# EAGLE board StarvingStudent (EAGLE 7.5.0)
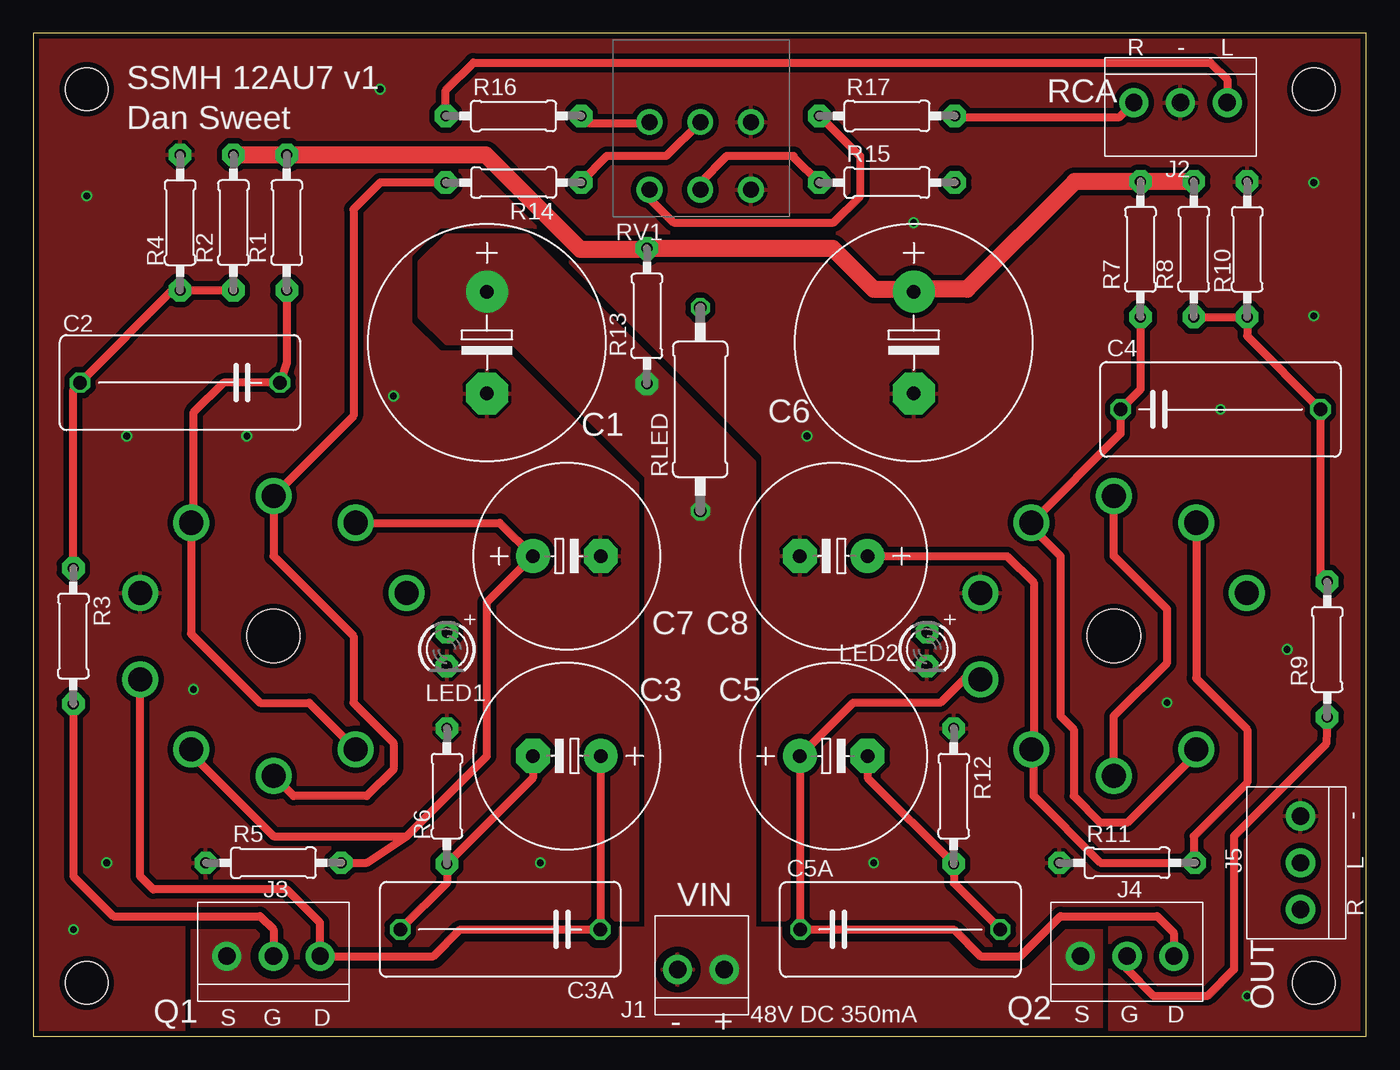
[diagram p0: board, top side]
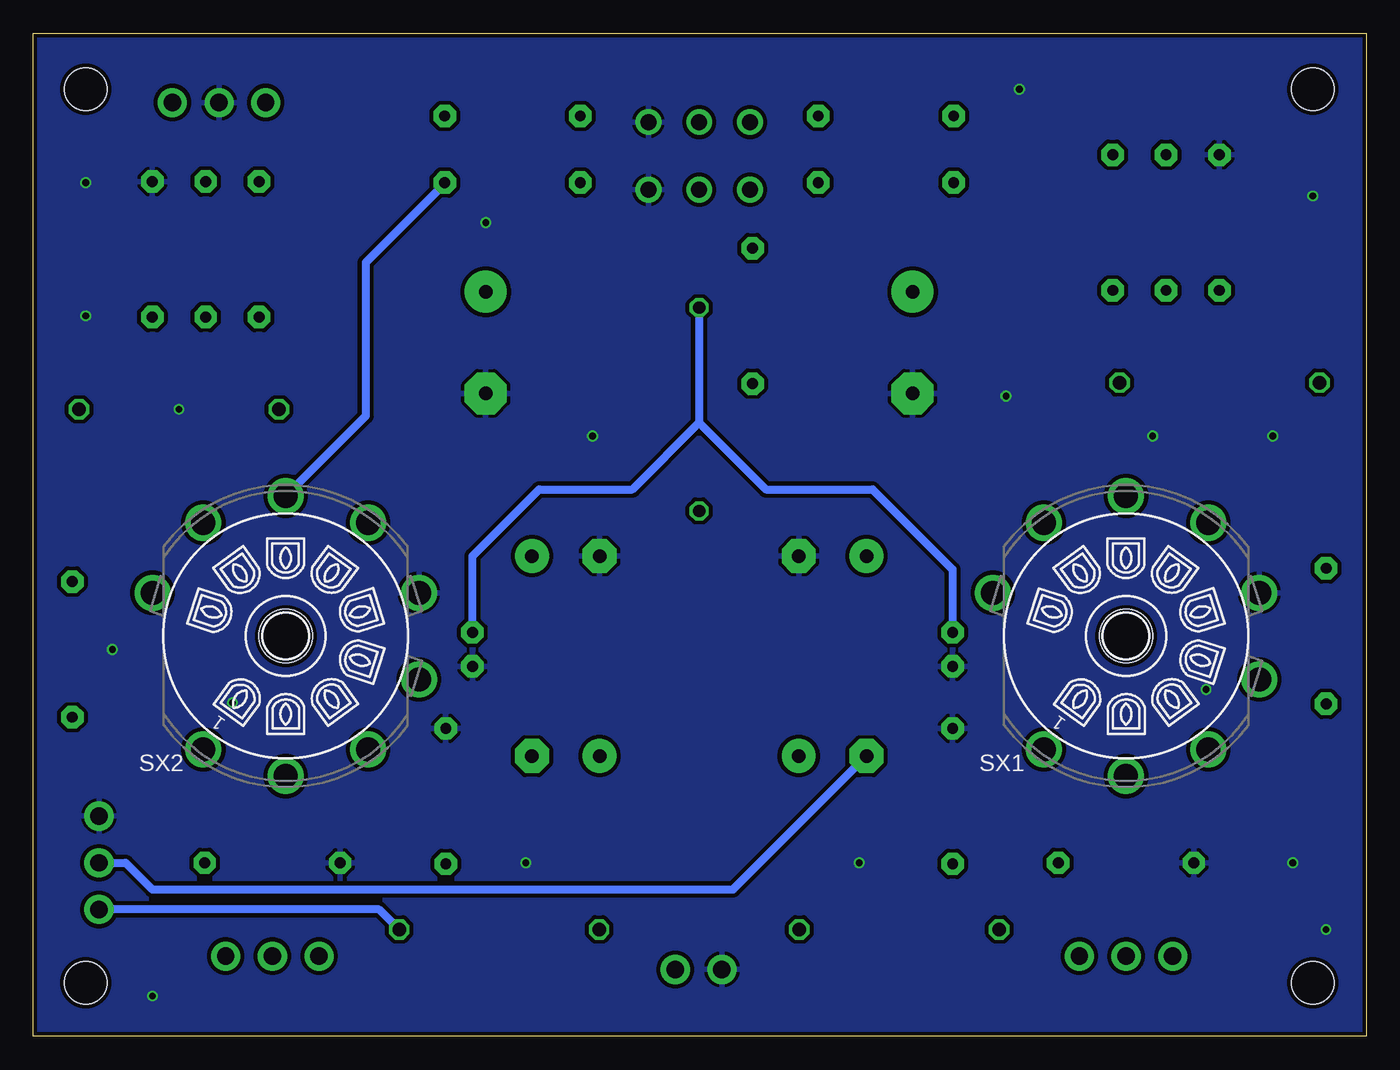
[diagram p1: board, bottom side, seen from below]

Size 99.92 x 75.19 mm. Coordinates in mm from the lower left corner, seen from the top.
Outline: 0,0 99.92,0 99.92,75.19 0,75.19 0,0
Copper layers (1*16): Top 0.035mm / dielectric 1.5mm / Bottom 0.035mm
Design rules "SeeedStudio_2layer_DRU_no_angle_20140221": minimum track width 6mil, minimum drill 12mil, track to track 6mil, track to pad 6mil, pad to pad 6mil, via to via 6mil, smd to smd 0mil, copper to edge 10mil, drill to drill 10mil, minimum pad ring 10mil, minimum via ring 6mil, stop-mask expansion 2mil, vias tented up to drill 100mil, thermal gap 10mil
Holes 4 mm at 18,30 81,30
Holes 3.2 mm at 4,4 4,71 96,71 96,4

## Footprints (pad centres in the part's own frame; a part is rotated, then mirrored left to right if it is on the bottom)
E7,5-18 = drill 1.016 pad 3.15: + -3.81,0 | drill 1.016 pad 3.15 octagon: - 3.81,0
C150-072X183 = drill 1.016 octagon: 1 -7.493,0; 2 7.493,0
E5-13 = drill 1.016 pad 2.54: + -2.54,0 | drill 1.016 pad 2.54 octagon: - 2.54,0
1X2-3.5MM = drill 1.3 pad 2.184: 1 1.8,0; 2 -1.7,0
1X3-3.5MM = drill 1.3 pad 2.184: 1 3.5,0; 2 0.001,-0.001; 3 -3.499,-0.001
LED3MM = drill 0.813 pad 1.676 octagon: A -1.27,0; K 1.27,0
0207/10 = drill 0.813 pad 1.676 octagon: 1 -5.08,0; 2 5.08,0
0411/15 = drill 0.914 octagon: 1 -7.62,0; 2 7.62,0
RV122F = drill 1.2 pad 1.93: L1 -3.81,2.54; L2 0,2.54; L3 3.81,2.54; R1 -3.81,-2.54; R2 0,-2.54; R3 3.81,-2.54
VT9-PT = drill 1.8 pad 2.4: 1 6.172,8.495; 2 0,10.5; 3 -6.172,8.495; 4 -9.986,3.245; 5 -9.986,-3.245; 6 -6.172,-8.495; 7 0,-10.5; 8 6.172,-8.495; 9 9.986,-3.244

## Placement (x,y rotation side)
C1  680uF  [E7,5-18]  34,52 270 top
C2  0.22uF  [C150-072X183]  11,49 180 top
C3  470uF  [E5-13]  40,21 180 top
C3A  0.22uF  [C150-072X183]  35,8 180 top
C4  0.22uF  [C150-072X183]  89,47 0 top
C5  470uF  [E5-13]  60,21 0 top
C5A  0.22uF  [C150-072X183]  65,8 0 top
C6  680uF  [E7,5-18]  66,52 270 top
C7  220uF  [E5-13]  40,36 0 top
C8  220uF  [E5-13]  60,36 180 top
DRILEGEND  [DRILEGEND]  -1.2,-5.01 0 top  (outside the outline)
J1  1X2-3.5MM  [1X2-3.5MM]  50,5 0 top
J2  1X3-3.5MM  [1X3-3.5MM]  86,70 180 top
J3  1X3-3.5MM  [1X3-3.5MM]  18,6 0 top
J4  1X3-3.5MM  [1X3-3.5MM]  82,6 0 top
J5  1X3-3.5MM  [1X3-3.5MM]  95,13 90 top
LED1  [LED3MM]  31,29 270 top
LED2  [LED3MM]  67,29 270 top
R1  33k  [0207/10]  19,61 90 top
R2  390k  [0207/10]  15,61 90 top
R3  2k  [0207/10]  3,30 270 top
R4  220k  [0207/10]  11,61 270 top
R5  2k  [0207/10]  18,13 0 top
R6  2k  [0207/10]  31,18 270 top
R7  33k  [0207/10]  83,59 90 top
R8  390k  [0207/10]  87,59 90 top
R9  2k  [0207/10]  97,29 270 top
R10  220k  [0207/10]  91,59 270 top
R11  2k  [0207/10]  82,13 0 top
R12  2k  [0207/10]  69,18 270 top
R13  2k  [0207/10]  46,54 90 top
R14  1k  [0207/10]  36,64 180 top
R15  1k  [0207/10]  64,64 0 top
R16  50k  [0207/10]  36,69 0 top
R17  50k  [0207/10]  64,69 0 top
RLED  2.4k  [0411/15]  50,47 90 top
RV1  RV122F  [RV122F]  50,66 0 top
SX1  VT9-PT  [VT9-PT]  18,30 180 bottom
SX2  VT9-PT  [VT9-PT]  81,30 180 bottom

## Library data of the parts
C1-C3 C3A C4 C5 C5A C6-C8 = resistor
DRILEGEND = drilegend
J1-J5 RV1 = DansLibrary
LED1 LED2 R1-R17 RLED = adafruit
SX1 SX2 = belton-engineering

## Nets
GND: C1.- C6.- C7.- C8.- J1.2 J2.2 J5.1 LED1.K LED2.K R4.1 R5.1 R6.1 R10.1 R11.1 R12.1 RV1.L3 RV1.R3 SX1.5 SX2.5
N$1: J2.3 R16.1
N$2: J2.1 R17.2
N$3: C2.1 R1.1 SX1.1 SX1.6
N$4: C7.+ R5.2 SX1.3 SX1.8
N$5: R14.2 SX1.2 SX1.7
N$6: LED1.A LED2.A RLED.2
N$7: C2.2 R2.1 R3.1 R4.2
N$8: C5.+ C5A.1 J4.1 SX2.4
N$9: J3.2 R3.2
N$10: C6.+ R1.2 R2.2 R7.2 R8.2 R13.2
N$11: C4.1 R7.1 SX2.1 SX2.6
N$12: C8.+ R11.2 SX2.3 SX2.8
N$13: R15.2 SX2.2 SX2.7
N$14: R14.1 RV1.L2
N$15: C4.2 R8.1 R9.1 R10.2
N$16: J4.2 R9.2
N$17: C3.+ C3A.1 J3.1 SX1.4
N$18: C5.- C5A.2 J5.3 R12.2
N$19: R15.1 RV1.R2
N$20: C3.- C3A.2 J5.2 R6.2
N$21: R16.2 RV1.L1
N$22: R17.1 RV1.R1
VIN: C1.+ J1.1 J3.3 J4.3 R13.1 RLED.1

## Tracks (layer width: path | path; a pad name or v marks a point on that pad's centre or on a via)
GND  (via drill 0.5)
  other vias: 4,63 26,71 66,61 58,45 96,64 96,54 89,47 3,8 38,13 63,13 91,3 27,48 16,45 7,45 12,26 85,25 94,29 5.5,13
  pour Top (isolate 0.406, rank 2): 0,75 0,0 100,0 100,75
  pour Bottom (isolate 0.305): -1,76 101,76 101,-1 -1,-1
N$1
  Top 0.61: R16.1 30.92,70.92 33,73 88.25,73 89.5,71.75 J2.3
N$2
  Top 0.61: R17.2 69.08,68.92 81.42,68.92 J2.1
N$3
  Top 0.61: R1.1 19,50.49 C2.1 14.25,49 12,46.75 12,38.67 SX1.6 11.83,30.17 17,25 20.68,25 SX1.1
N$4
  Top 0.61: SX1.8 34.97,38.49 C7.+ 34,32.54 34,21 28,15 | SX1.3 11.83,21.17 18,15 28,15 | R5.2 25,13 28,15
N$5
  Top 0.61: R14.2 26,64 24,62 24,46.5 SX1.7 18,36 24,30 24,25 27,22 27,20 25,18 19.5,18 SX1.2
N$6
  Bottom 0.61: RLED.2 50,46 | 50,46 45,41 37,41 31,35 LED1.A | LED2.A 67,36 62,41 55,41 50,46
N$7
  Top 0.61: R2.1 R4.2 10.43,55.92 C2.2 3,48.49 R3.1
N$8
  Top 0.61: SX2.4 69.75,26.75 68,25 61.46,25 C5.+ 57.46,8.05 C5A.1 69,8 71,6 74,6 77,9 84.25,9 85.5,7.75 J4.1
N$9
  Top 0.61: R3.2 3,12 6,9 17,9 18,8 J3.2
N$10
  Top 1.27: R2.2 R1.2 33.92,66.08 41,59 45.92,59 R13.2 59.92,59.08 63,56 65.81,56 C6.+ 66.19,56 70,56 78.08,64.08 R7.2 R8.2
N$11
  Top 0.61: R7.1 83,48.49 C4.1 81.51,45.17 SX2.6 74.83,38.17 77,36 77,24 78,23 78,18 80,16 82,16 87.17,21.17 SX2.1
N$12
  Top 0.61: C8.+ 73,36 75,34 75,21.68 SX2.3 75,21.33 75,18 80,13 R11.2 87,13.08 87,15 91,19 91,23 87.17,26.83 SX2.8
N$13
  Top 0.61: SX2.2 81,24 85,28 85,32 81,36 SX2.7
  Bottom 0.61: R15.2 69.08,63.92 75,58 75,46.5 SX2.7
N$14
  Top 0.61: R14.1 41.08,64.08 43,66 47.46,66 RV1.L2
N$15
  Top 0.61: R8.1 R10.2 91,52.49 C4.2 96.49,34.59 R9.1
N$16
  Top 0.61: R9.2 96.92,21.92 90,15 90,5 88,3 84,3 82,5 J4.2
N$17
  Top 0.61: C3.+ 42.54,8.05 C3A.1 32,8 30,6 J3.1 21.5,8.5 19,11 9,11 8,12 8,26.74 SX1.4
N$18
  Top 0.61: C5.- 62.54,19.38 R12.2 69,11.49 C5A.2
  Bottom 0.61: C5A.2 74,9.5 J5.3
N$19
  Top 0.61: RV1.R2 50,64 52,66 57,66 57,65.92 R15.1
N$20
  Top 0.61: C3.- 37.46,19.38 R6.2 31,11.49 C3A.2
  Bottom 0.61: C3.- 47.46,11 91,11 93,13 J5.2
N$21
  Top 0.61: R16.2 41.62,68.46 46.11,68.46 RV1.L1
N$22
  Top 0.61: R17.1 61.92,66 62,66 62,63 60,61 48,61 46.19,62.81 RV1.R1
VIN
  pour Top (isolate 0.61, no thermals): 54,43 37,60 31,60 29,58 29,54 31,52 36,52 46,42 46,-1 54,-1
  pour Top (isolate 0.61, no thermals): 80,8 80,-1 12,-1 12,8

## Text on the board
tPlace: 48V DC 350mA
tNames: R | - | L | SSMH 12AU7 v1 | RCA | Dan Sweet | - | L | VIN | R | OUT | Q1 | S | G | D | Q2 | S | G | D | - | +
DrillLegend: LAYER-STACK
DrillLegend_01-16: 01-16
DrillLegend_01-20: 01-20